# EAGLE board wrist_v2 (EAGLE 9.6.2)
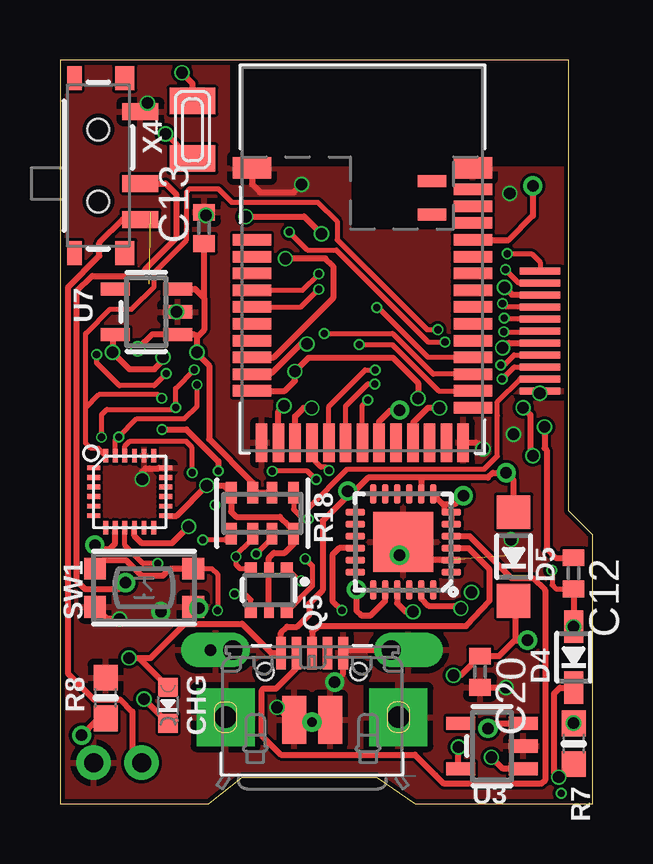
[diagram p0: board, top side]
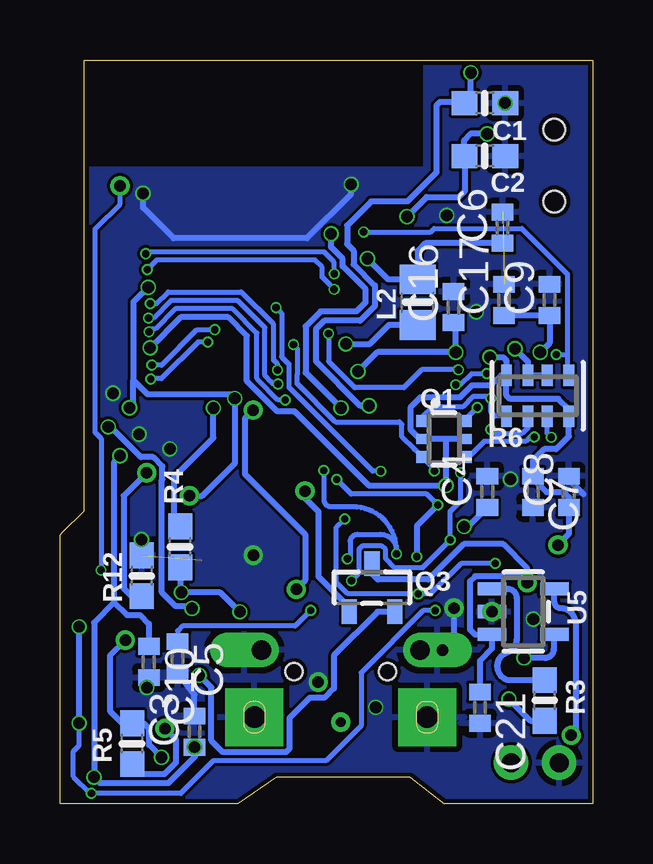
[diagram p1: board, bottom side, seen from below]

Size 22.2 x 31 mm. Coordinates in mm from the lower left corner, seen from the top.
Outline: 0,0 6.2,0 7.6,1.1 13.2,1.1 14.8,0 22.1,0 22.2,0 22.2,11.2 22.1,11.3 21.2,12.2 21.2,31 0,31 0,0
Copper layers (1*16): Top 0.035mm / dielectric 1.6mm / Bottom 0.035mm
Design rules "jlcpcb-2layers *": minimum track width 5mil, minimum drill 0.3mm, track to track 5mil, track to pad 5mil, pad to pad 5mil, via to via 5mil, smd to smd 5mil, copper to edge 0.2mm, drill to drill 6mil, minimum pad ring 10mil, minimum via ring 3mil, stop-mask expansion 4mil, vias tented up to drill 20mil, thermal gap 10mil
Net classes: 0 default: width 0.203 mm; 1 highpower: width 0.254 mm, drill 0.483 mm

## Footprints (pad centres in the part's own frame; a part is rotated, then mirrored left to right if it is on the bottom)
0603-NO = smd 1.075 x 1: 1 -0.85,0; 2 0.85,0
C0402 = smd 0.7 x 0.9: 1 -0.65,0; 2 0.65,0
CHIPLED_0603_NOOUTLINE = smd 0.8 x 0.8: A 0,-0.75; C 0,0.75
SOD-323 = smd 1.35 x 0.8: A 1.27,0; C -1.27,0
SOD-123 = smd 1.4 x 1.4: A 1.85,0; C -1.85,0
ADAFRUIT_SENSOR_QFN24_3MM_NOEP = smd 0.55 x 0.2: 1 -1.5,1; 2 -1.5,0.6; 3 -1.5,0.2; 4 -1.5,-0.2; 5 -1.5,-0.6; 6 -1.5,-1; 13 1.5,-1; 14 1.5,-0.6; 15 1.5,-0.2; 16 1.5,0.2; 17 1.5,0.6; 18 1.5,1 | smd 0.2 x 0.55: 7 -1,-1.5; 8 -0.6,-1.5; 9 -0.2,-1.5; 10 0.2,-1.5; 11 0.6,-1.5; 12 1,-1.5; 19 1,1.5; 20 0.6,1.5; 21 0.2,1.5; 22 -0.2,1.5; 23 -0.6,1.5; 24 -1,1.5
0805-NO = smd 1.24 x 1.5: 1 -0.95,0; 2 0.95,0
SOT363 = smd 0.5 x 0.5: 1 -0.75,-0.9; 3 0.75,-0.9; 4 0.75,0.9; 6 -0.75,0.9 | smd 0.4 x 0.5: 2 0,-0.9; 5 0,0.9
SOT23-R = smd 0.635 x 1.016: 1 -0.95,-1; 2 0.95,-1; 3 0,1
RESPACK_4X0603 = smd 0.45 x 0.9: 1 -1.3,-0.85; 2 -0.4,-0.85; 3 0.4,-0.85; 4 1.3,-0.85; 5 1.3,0.85; 6 0.4,0.85; 7 -0.4,0.85; 8 -1.3,0.85
SWITCH_SPST_SMD_A = smd 0.7 x 1.5: 1 -2.25,-1.75; 2 -0.75,-1.75; 3 2.25,-1.75 | smd 1 x 0.6: GND1 -3.65,1; GND3 3.65,1 | smd 1 x 0.8: GND2 -3.65,-1.1; GND4 3.65,-1.1 | hole 0.9: -1.5,0; 1.5,0
BTN_KMR2_4.6X2.8 = smd 0.9 x 0.9: A 2.05,0.8; A' -2.05,0.8; B 2.05,-0.8; B' -2.05,-0.8
BLE_MODULE_RAYTAC_MDBT42 = smd 1.6 x 0.9: 1 -4.6,3.8; 39 4.6,3.8 | smd 1.6 x 0.48: 2 -4.6,0.8; 3 -4.6,0.1; 4 -4.6,-0.6; 5 -4.6,-1.3; 6 -4.6,-2; 7 -4.6,-2.7; 8 -4.6,-3.4; 9 -4.6,-4.1; 10 -4.6,-4.8; 11 -4.6,-5.5; 25 4.6,-6.2; 26 4.6,-5.5; 27 4.6,-4.8; 28 4.6,-4.1; 29 4.6,-3.4; 30 4.6,-2.7; 31 4.6,-2; 32 4.6,-1.3; 33 4.6,-0.6; 34 4.6,0.1; 35 4.6,0.8; 36 4.6,1.5; 37 4.6,2.2; 38 4.6,2.9 | smd 0.48 x 1.6: 12 -4.2,-7.65; 13 -3.5,-7.65; 14 -2.8,-7.65; 15 -2.1,-7.65; 16 -1.4,-7.65; 17 -0.7,-7.65; 18 0,-7.65; 19 0.7,-7.65; 20 1.4,-7.65; 21 2.1,-7.65; 22 2.8,-7.65; 23 3.5,-7.65; 24 4.2,-7.65 | smd 1.2 x 0.5: 40 2.9,3.25; 41 2.9,1.85
SOT23-5 = smd 0.55 x 1.2: 1 -0.95,-1.3; 2 0,-1.3; 3 0.95,-1.3; 4 0.95,1.3; 5 -0.95,1.3
MICROBUILDER_QFN24_4MM_SMSC = smd 0.8 x 0.28: 1 -2,1.25; 2 -2,0.75; 3 -2,0.25; 4 -2,-0.25; 5 -2,-0.75; 6 -2,-1.25; 13 2,-1.25; 14 2,-0.75; 15 2,-0.25; 16 2,0.25; 17 2,0.75; 18 2,1.25 | smd 0.28 x 0.8: 7 -1.25,-2; 8 -0.75,-2; 9 -0.25,-2; 10 0.25,-2; 11 0.75,-2; 12 1.25,-2; 19 1.25,2; 20 0.75,2; 21 0.25,2; 22 -0.25,2; 23 -0.75,2; 24 -1.25,2 | smd 2.5 x 2.5: THERM 0,0
FPC1105 = smd 0.3 x 1.7: P$1 -2,0; P$2 -1.5,0; P$3 -1,0; P$4 -0.5,0; P$5 0,0; P$6 0.5,0; P$7 1,0; P$8 1.5,0; P$9 2,0; P$10 2.5,0; P$11 3,0
M3-HOLE_M0.9-HOLE = drill 0.8 pad 0.55: P$1 0,0
4UCONN_20329_V2 = smd 1 x 2: BASE@1 -0.75,-2; BASE@2 0.75,-2 | smd 0.4 x 1.35: D+ 0,0.775; D- -0.65,0.775; GND 1.3,0.775; ID 0.65,0.775; VBUS -1.3,0.775 | drill 0.8 pad 1.143 offset: SPRT@1 -3.3,0.9; SPRT@2 3.3,0.9 | drill 0.9 pad 2.413 square: SPRT@3 -3.6,-1.9; SPRT@4 3.6,-1.9 | hole 0.7: -1.95,0; 1.95,0
XTAL3215 = smd 1.1 x 1.9: P$1 1.2,0; P$2 -1.2,0

## Placement (x,y rotation side)
C1  22pF  [0603-NO]  4.5,29.2 0 bottom
C2  22pF  [0603-NO]  4.5,27 0 bottom
C3  10uF  [C0402]  16.6,3 90 bottom
C4  0.1uF  [C0402]  4.4,13 90 bottom
C5  10uF  [C0402]  17.3,6.1 270 bottom
C6  1uF  [C0402]  3.76,24.01 90 bottom
C7  1uF  [C0402]  2.5,13 270 bottom
C8  0.1uF  [C0402]  1,13 90 bottom
C9  0.1uF  [C0402]  1.8,21 90 bottom
C10  0.1uF  [C0402]  18.5,5.9 270 bottom
C12  0.1uF  [C0402]  21.4,9.6 270 top
C13  10uF  [C0402]  6,24 90 top
C16  10uF  [C0402]  5.8,20.7 90 bottom
C17  10uF  [C0402]  3.7,21 90 bottom
C20  10uF  [C0402]  17.5,5.5 270 top
C21  10uF  [C0402]  4.7,4 270 bottom
CHG  RED  [CHIPLED_0603_NOOUTLINE]  4.5,4.1 180 top
D4  1N4148  [SOD-323]  21.4,6.1 90 top
D5  MBR120  [SOD-123]  18.9,10.3 90 top
IC1  ADAFRUIT_SENSOR_MPU-9250_ICM20948  [ADAFRUIT_SENSOR_QFN24_3MM_NOEP]  2.9,13 0 top
L2  10uH  [0805-NO]  7.3,20.9 270 bottom
Q1  BSS138  [SOT363]  6.2,15.2 270 bottom
Q3  DMG3415U-7  [SOT23-R]  9.2,9 0 bottom
Q5  BSS138  [SOT363]  8.7,8.9 180 top
R3  1K  [0603-NO]  2,4.3 90 bottom
R4  1K  [0603-NO]  17.2,10.7 90 bottom
R5  100K  [0603-NO]  19.2,2.5 90 bottom
R6  10K  [RESPACK_4X0603]  2.3,17 180 bottom
R7  10K  [0603-NO]  21.4,2.5 270 top
R8  10K  [0603-NO]  1.9,4.4 90 top
R12  100k  [0603-NO]  18.8,9.5 270 bottom
R18  10K  [RESPACK_4X0603]  8.43,12.1 180 top
S2  [SWITCH_SPST_SMD_A]  1.6,26.6 90 top
SW1  KMR2  [BTN_KMR2_4.6X2.8]  3.5,9 0 top
U1  MDBT42  [BLE_MODULE_RAYTAC_MDBT42]  12.6,22.7 0 top
U3  AP2112(3.3V)  [SOT23-5]  18,2.4 90 top
U5  MCP73831T-2ACI/OT  [SOT23-5]  2.9,8 270 bottom
U7  MIC5225-1.8V  [SOT23-5]  3.6,20.5 90 top
U8  [MICROBUILDER_QFN24_4MM_SMSC]  14.3,10.9 180 top
U$7  FPC1105  [FPC1105]  20,20.2 270 top
U$9  M3-HOLE_M0.9-HOLE0.9MM  [M3-HOLE_M0.9-HOLE]  3.4,1.7 0 bottom
U$13  M3-HOLE_M0.9-HOLE0.9MM  [M3-HOLE_M0.9-HOLE]  1.4,1.7 0 bottom
X3  4u20329  [4UCONN_20329_V2]  10.5,5.5 0 top
X4  32.768  [XTAL3215]  5.52,28.09 90 top

## Library data of the parts
C1 C2 CHG D4 D5 L2 Q1 Q3 Q5 R3-R8 R12 R18 SW1 U1 U3 U5 U7 X3 = microbuilder
C3-C10 C12 C13 C16 C17 C20 C21 = rcl; SPICEPREFIX: C
IC1 = Adafruit ICM20948
S2 = SparkFun-Switches; PROD_ID: SWCH-10651; SF_SKU: COM-10860
U8 = Adafruit nRF52 Bluefruit Feather
U$7 = my_library
U$9 U$13 = 3M_Hole
X4 = adafruit2

## Nets
1.8V [highpower]: C7.1 C8.1 C9.1 C17.1 IC1.8 IC1.13 Q1.2 Q1.5 Q5.2 Q5.5 R6.4 R6.8 R18.4 R18.8 U7.5 U$7.P$7
3.3V [highpower]: C3.1 C10.1 C13.1 C16.1 D4.C R6.2 R6.3 R7.2 R18.2 R18.3 U1.11 U3.5 U7.1 U7.3 U8.5 U8.6 U8.7 U$7.P$3
!CS: IC1.22 Q5.1 R18.5
A0/0.02: Q5.6 R18.7 U1.15
A1/0.03: U1.16 U$7.P$4
A2/0.04: U1.17 U$7.P$5
A3/0.05: U1.18 U$7.P$6
A4/0.28: U1.5 U$7.P$1
A5/0.29: U1.6 U$7.P$2
AD0/SDO: IC1.9 Q5.4 R18.1 U$7.P$10
DTR [highpower]: C12.1 U8.23
EN [highpower]: R5.1 U3.3
GND [highpower]: C1.2 C2.2 C3.2 C4.2 C5.2 C6.2 C7.2 C8.2 C9.2 C10.2 C13.2 C16.2 C17.2 C20.2 C21.2 IC1.18 IC1.20 R8.2 R12.1 S2.3 SW1.B SW1.B' U1.1 U1.12 U1.24 U1.39 U3.2 U5.2 U7.2 U8.2 U8.THERM U$7.P$11 U$13.P$1 X3.BASE@1 X3.BASE@2 X3.GND X3.SPRT@1 X3.SPRT@2 X3.SPRT@3 X3.SPRT@4
MISO: Q5.3 R18.6 U1.28
MOSI: Q1.6 R6.7 U1.27
N$1 [highpower]: C1.1 U1.13 X4.P$1
N$2 [highpower]: C2.1 U1.14 X4.P$2
N$3 [highpower]: L2.2 U1.10
N$4: CHG.C R3.1
N$5: C5.1 U8.16
N$6: C4.1 IC1.10
N$8 [highpower]: C6.1 L2.1 U1.9
N$9 [highpower]: R3.2 U5.1
N$10 [highpower]: R8.1 U5.5
N$12 [highpower]: S2.1 U$9.P$1
N$15 [highpower]: R4.1 U8.21
RESET: C12.2 D4.A R7.1 SW1.A SW1.A' U1.35
RXD [highpower]: R4.2 U1.21
SCK: Q1.3 R6.6 U1.26
SCL/SCLK: IC1.23 Q1.4 R6.1 U$7.P$9
SDA/SDI: IC1.24 Q1.1 R6.5 U$7.P$8
TXD [highpower]: U1.19 U8.20
USBD+ [highpower]: U8.3 X3.D+
USBD- [highpower]: U8.4 X3.D-
VBAT [highpower]: C21.1 Q3.3 S2.2 U5.3
VBUS [highpower]: CHG.A D5.A Q3.1 R12.2 U5.4 U8.8 X3.VBUS
VIN [highpower]: C20.1 D5.C Q3.2 R5.2 U3.1

## Tracks (layer width: path | path; a pad name or v marks a point on that pad's centre or on a via)
1.8V  (via drill 0.48, 0.48 pad 0.8)
  Top 0.254: Q5.5 Q5.2 8.7,10.24 8.91,10.46 9.37,10.46 9.74,10.82 R18.8 9.73,11.57 9.55,11.57 9.16,11.95 7.34,11.95 7.13,12.16 R18.4 6.83,13.26 v6.12,13.26 4.86,12 IC1.13 | v1.45,10.78 1.63,10.6 2.05,10.6 2.3,10.85 IC1.8 | v18.45,19 18.64,19.19 18.69,19.19 18.7,19.2 U$7.P$7 | v4.29,18.61 4.29,18.47 3.93,18.11 2.89,18.11 v2.19,18.81 2.19,19.44 U7.5
  Bottom 0.254: 1,11.24 | 1,11.24 v1.45,10.79 v1.45,10.78 | R6.4 3.82,17.85 4.22,17.45 5.03,17.45 5.54,16.93 7.18,16.93 7.6,16.51 7.6,15.6 7.21,15.2 Q1.2 6.17,15.2 | R6.4 3.6,17.01 3.46,16.87 1.43,16.87 1,16.44 R6.8 1,15.31 1.53,14.78 2.02,14.78 2.5,14.3 C7.1 2.5,13.56 1.92,12.98 1.2,12.98 1,12.78 C8.1 1,11.24 | R6.4 3.6,18.47 3.74,18.61 v4.29,18.61 | v18.45,19 17.17,20.27 15.19,20.27 14.41,19.49 14.41,17.61 13.14,16.35 12.42,16.35 9.34,13.27 v6.13,13.27 v6.12,13.26 6.12,13.66 | v2.19,18.81 1.8,19.2 C9.1 C17.1 | Q1.5 6.17,15.2 | 6.12,13.66 | 6.17,15.2 6.12,15.15 6.12,13.66
3.3V  (via drill 0.48, 0.48 pad 0.8)
  Top 0.254: U8.5 U8.6 16.02,12.15 16.02,12.43 15.95,12.5 | U8.7 15.95,12.5 | 15.95,12.5 16.48,12.5 v16.81,12.83 | R18.2 R18.3 8.03,13.37 6.21,15.19 6.21,18.27 5.71,18.76 v5.71,18.82 5.71,19.45 | v14.92,16.89 14.92,17.54 13.88,18.57 10.35,18.57 v9.79,18.01 9.79,17.62 9.37,17.2 U1.11 | 5.71,19.45 5.61,19.55 U7.1 4.88,19.57 3.85,19.57 v3.24,18.96 | v18.52,21.52 18.84,21.21 U$7.P$3 | 6,21.08 6,19.74 5.71,19.45 | U7.3 5.63,21.45 6,21.08 | 6,21.08 C13.1 | v19.7,14.5 19.6,14.6 19.6,16.2 v19.3,16.5 | R7.2 20.85,1.1 v20.78,1.1 20.59,1.29 20.59,4.59 20.83,4.83 D4.C | U3.5 16.6,1.55 C3.1
  Bottom 0.254: R6.2 R6.3 2.7,18.42 v3.24,18.96 | v16.81,12.83 16.28,12.83 14.91,14.2 14.91,16.89 v14.92,16.89 15.09,17.06 18.55,17.06 19.14,17.65 | v9.79,18.01 8.98,18.82 v5.71,18.82 5.71,19.96 C16.1 | v18.52,21.52 19.14,20.91 19.14,17.65 | C10.1 18.5,7.5 18.86,7.86 19.41,7.86 19.93,8.39 | v19.7,14.5 19.93,14.27 19.93,8.39 | v19.3,16.5 19.14,16.66 19.14,17.65 | 16.6,2.51 C3.1 16.58,2.33 16.58,1.96 17.69,0.85 20.53,0.85 v20.78,1.1 20.78,7.54 19.93,8.39
  other vias: 16.6,2.35
!CS  (via drill 0.3)
  Top 0.203: R18.5 6.87,10.99 v5.94,10.99 | IC1.22 2.7,14.9 2.91,15.11 5.24,15.11 5.51,14.84 v5.51,13.79 | v10.06,9.29 9.96,9.29 Q5.1
  Bottom 0.203: v10.06,9.29 9.75,9.6 9.75,10.6 9.61,10.74 8.79,10.74 8.64,10.59 8.64,10.22 8.24,9.83 7.1,9.83 v5.94,10.99 5.94,12.18 5.51,12.61 v5.51,13.79
A0/0.02  (via drill 0.3)
  Top 0.203: Q5.6 10.52,9.07 10.52,9.91 v10.22,10.21 | v8.18,10.41 8.34,10.57 8.35,10.57 8.83,11.05 R18.7 | U1.15 10.55,15 10.55,14.34 10.87,14.02 11.08,14.02 v11.21,13.89
  Bottom 0.203: v11.21,13.89 11.2,13.88 11.2,12.67 arc-90 10.9,12.37 9.99,12.37 arc90 8.18,10.56 | v10.22,10.21 arc-90 10.11,10.32 10.11,10.91 arc90 9.8,11.22 8.84,11.22 arc90 8.18,10.56 | v8.18,10.41 8.18,10.56
A1/0.03  (via drill 0.3)
  Top 0.203: U1.16 11.2,16.56 12.71,18.07 v13.14,18.07 | U$7.P$4 18.58,20.7 v18.44,20.84
  Bottom 0.203: v13.14,18.07 13.14,18.32 13.3,18.48 13.3,19.98 14.65,21.33 17.7,21.33 18.19,20.84 v18.44,20.84
A2/0.04  (via drill 0.3)
  Top 0.203: U1.17 11.9,16.57 12.82,17.5 v13.12,17.5 | U$7.P$5 18.55,20.2 v18.51,20.25
  Bottom 0.203: v18.51,20.25 18.3,20.25 17.58,20.97 14.8,20.97 13.66,19.84 13.66,17.86 13.39,17.58 13.3,17.5 v13.12,17.5
A3/0.05  (via drill 0.3)
  Top 0.203: U1.18 12.6,16.61 v12.82,16.83 | v18.49,19.67 19.97,19.67 U$7.P$6
  Bottom 0.203: v12.82,16.83 13.12,16.83 13.95,17.65 13.95,17.67 13.99,17.72 13.99,19.62 15.01,20.63 17.39,20.63 18.23,19.79 18.36,19.79 v18.49,19.67
A4/0.28  (via drill 0.3)
  Top 0.203: U1.5 10.1,21.4 v10.78,22.08 | v18.63,22.92 19.65,22.92 20,22.57 U$7.P$1
  Bottom 0.203: v10.78,22.08 10.78,22.57 11.2,22.99 18.56,22.99 v18.63,22.92
A5/0.29  (via drill 0.3)
  Top 0.203: U1.6 10.04,20.7 v10.78,21.44 | v18.56,22.26 19.12,21.7 U$7.P$2
  Bottom 0.203: v10.78,21.44 11.28,21.94 11.28,22.36 11.58,22.66 18.16,22.66 v18.56,22.26
AD0/SDO  (via drill 0.3)
  Top 0.203: v4.07,10.01 3.46,10.01 2.7,10.76 IC1.9 | U$7.P$10 19.18,17.7 18.23,16.75 18.23,16.16 18.22,16.16 18.22,14.48 17.69,13.95 11.98,13.95 10.34,12.31 v10.34,11.87 10.13,11.87 9.73,12.27 R18.1 | Q5.4 7.95,8.49 7.71,8.73 v7.27,8.73
  Bottom 0.203: v4.07,10.01 5.49,10.01 6.76,8.73 v7.27,8.73 7.28,8.74 10.21,8.74 10.68,9.21 10.68,11.53 v10.34,11.87
DTR  (via drill 0.48)
  Top 0.254: v16.7,8.14 16.59,8.25 15.35,8.25 15.05,8.54 U8.23 | v20.19,15.7 20.19,14.82 20.27,14.74 20.27,10.63 20.65,10.25 C12.1
  Bottom 0.254: v16.7,8.14 16.79,8.23 17.38,8.23 17.95,8.8 17.95,13.5 17.94,13.52 17.94,14.06 18.32,14.44 18.83,14.44 20.09,15.7 v20.19,15.7
EN  (via drill 0.48 pad 0.8)
  Top 0.254: v17.83,3.13 18.05,3.35 U3.3
  Bottom 0.254: R5.1 18.78,1.23 17.85,1.23 17.36,1.72 17.36,2.66 v17.83,3.13
GND  (via drill 0.48, 0.48 pad 0.8)  (2 unrouted)
  Top 0.254: X3.SPRT@2 11.93,6.4 X3.GND 11.8,5.81 11.77,5.78 11.77,5.39 v11.44,5.06 | U8.2 14.35,10.15 v14.14,10.36 14.14,10.74 U8.THERM | X3.SPRT@1 v6.28,6.4 v6.27,6.39 | SW1.B' 1.96,7.69 v2.48,7.69 | U1.24 17.36,15.05 v17.62,14.79 | U1.1 8,25.82 8.34,25.48 9.74,25.48 v10.07,25.81 | X3.BASE@1 9.55,3.5 v9.04,4.01 | S2.3 3.35,28.9 C1.2 | U7.2 v4.86,20.5 | C13.2 6.08,24.57 v6.08,24.52 | v3.42,13.53 3.42,13.82 3.57,13.97 4.11,13.97 4.13,14 IC1.18 | C20.2 18.56,4.85 v18.58,4.83 | U$7.P$11 v20,17.12 v19.99,17.11
  Bottom 0.254: v6.27,6.39 5.78,6.88 v5.78,8.15 | v18.74,25.44 18.74,24.84 17.47,23.57 11.91,23.57 10.07,25.41 v10.07,25.81 | v18.58,4.83 18.4,5.01 C10.2 | C3.2 16.6,4.55 C5.2 | R12.1 v18.8,11.01 | C8.2 1,13.51 0.4,12.9
  other vias: 4.2,8 3.65,29.2 18.9,15.4
  pour Top: 0,31 7,31 7,26.5 22.9,26.5 22.9,-0.08 0,-0.08
  pour Bottom: 0,31 7,31 7,26.5 22.92,26.5 22.92,-0.09 0,-0.09
MISO  (via drill 0.3)
  Top 0.203: v13.2,20.67 13.26,20.67 15.33,18.6 U1.28 | 7.94,11.15 7.94,10.95 7.33,10.34 v7.33,10.29 7.33,9.96 7.49,9.8 Q5.3 | v10.67,13.51 v10.66,13.51 10.31,13.86 v8.84,13.86
  Top 0.254: 7.94,11.15 R18.6
  Bottom 0.203: v13.2,20.67 12.97,20.44 12.97,18.62 12.65,18.3 12.65,17.34 9.17,13.86 v8.84,13.86 | v6.46,12.45 6.92,12.9 10.07,12.9 v10.67,13.51
  Bottom 0.254: v6.46,12.45 7.33,11.58 v7.33,10.29
MOSI  (via drill 0.3)
  Top 0.203: v5.6,18.09 4.82,17.3 v4.82,16.5 4.82,16.43 1.95,16.43 1.73,16.21 v1.73,15.27 | v11.01,19.6 13.86,19.6 15.55,17.91 U1.27
  Bottom 0.203: Q1.6 5.3,16.02 v4.82,16.5 | v1.73,15.27 1.9,15.44 R6.7 | v5.6,18.09 7.12,18.09 7.87,17.34 9.91,17.34 11.01,18.44 v11.01,19.6
N$1  (via drill 0.48)
  Top 0.254: U1.13 9.1,16.35 v9.33,16.58 | v5.08,30.47 5.52,30.03 X4.P$1
  Bottom 0.254: v9.33,16.58 9.68,16.58 11.54,18.44 11.54,19.77 11.18,20.13 9.69,20.13 9.08,20.74 9.08,21.6 9.96,22.48 9.96,23.05 10.23,23.32 10.23,24.1 9.23,25.1 7.73,25.1 6.51,26.32 6.51,29.11 6.36,29.26 5.41,29.26 C1.1 5.08,29.51 v5.08,30.47
N$2  (via drill 0.48)
  Top 0.254: U1.14 9.8,16.14 10.15,16.49 v10.49,16.49 | v7.74,24.47 10.18,24.47 v10.9,23.75 | X4.P$2 5.42,26.89 v4.4,27.92
  Bottom 0.254: v10.49,16.49 11.96,17.96 11.96,19.89 11.34,20.51 9.85,20.51 9.46,20.9 9.46,21.44 10.42,22.41 10.42,22.72 10.9,23.19 v10.9,23.75 | v7.74,24.47 6.92,25.29 5.58,25.29 5.33,25.54 5.33,26.98 C2.1 5.35,27.67 5.1,27.92 v4.4,27.92
N$3  (via drill 0.48)
  Top 0.254: U1.10 8.05,17.95 8.83,17.95 10.04,19.16 v10.29,19.16
  Bottom 0.254: v10.29,19.16 9.29,19.16 8.85,19.6 8.5,19.95 L2.2
N$4  (via drill 0.48)
  Top 0.254: CHG.C v3.5,4.35
  Bottom 0.254: v3.5,4.35 2.6,3.45 R3.1
N$5  (via drill 0.3)
  Top 0.254: U8.16 11.64,10.65 11.35,10.35 11.35,8.45 v11.75,8.05
  Bottom 0.203: C5.1 17.3,7.2 17.1,7.4 12.4,7.4 v11.75,8.05
N$6  (via drill 0.48)
  Top 0.254: v5.36,11.55 4.66,10.85 3.41,10.85 3.1,11.17 IC1.10
  Bottom 0.254: C4.1 5.2,11.55 v5.36,11.55
N$7  (via drill 0.4 pad 0.8)
  other vias: 10.5,3.4
N$8  (via drill 0.48)
  Top 0.254: U1.9 8.91,18.6 11.38,21.07 11.38,22.4 11.06,22.72 v9.39,22.72
  Bottom 0.254: v9.39,22.72 8.52,21.85 L2.1 7.3,23.04 6.98,23.36 C6.1
N$9
  Bottom 0.254: U5.1 3.55,8.95 arc90 3.17,8.57 3.17,6.84 arc72 3.57,6.29 arc-148 3.54,5.15 R3.2
N$10  (via drill 0.48 pad 0.8)
  Top 0.254: v0.9,2.85 1.49,3.44 1.59,3.44 R8.1
  Bottom 0.254: v0.9,2.85 0.71,3.04 0.71,7.51 arc-90 1.34,8.14 arc90 1.6,8.4 U5.5
N$12
  Top 0.254: U$9.P$1 3.02,1.89 3.02,3.83 2.5,4.34 1.41,4.34 0.33,5.43 0.33,21.52 1.64,22.84 1.64,23.2 | 1.64,23.2 1.64,23.38 2.61,24.35 S2.1 | 1.64,23.2
N$15  (via drill 0.48)
  Top 0.254: U8.21 14.05,8.35 14.41,7.99 v14.71,7.99
  Bottom 0.254: R4.1 17.2,8.86 v17.15,8.8 v17.14,8.8 15.52,8.8 v14.71,7.99
RESET  (via drill 0.3, 0.48, 0.48 pad 0.8)
  Top 0.203: SW1.A 6.33,9.8 6.56,9.57 v6.56,8.04 | v20.49,9.73 20.5,9.72 20.5,9.11 20.66,8.95 21.27,8.95
  Top 0.254: v19.7,25.75 19.7,24.51 18.69,23.5 U1.35 | SW1.A' 1.79,10.14 2.75,10.14 3.39,9.51 4.3,9.51 4.59,9.8 SW1.A | D4.A C12.2 21.27,8.95
  Bottom 0.203: v6.56,8.04 7.06,8.04 9.65,5.45 9.65,3.25 11.12,1.78 15.81,1.78 17.17,0.43 v20.89,0.43 20.95,0.43 21.65,1.12 21.65,2.18 21.4,2.42 R7.1 | v20.49,9.73 20.49,15.23 20.73,15.47 20.73,23.96 19.7,25 v19.7,25.75
  Bottom 0.254: R7.1 D4.A
  other vias: 21.4,3.35 21.4,7.37
RXD  (via drill 0.48)
  Top 0.254: v15.81,16.49 15.33,16.49 14.7,15.86 U1.21
  Bottom 0.254: R4.2 17.47,11.82 17.47,13.59 15.81,15.25 v15.81,16.49
SCK  (via drill 0.3)
  Top 0.203: U1.26 15.77,17.2 13.84,19.13 v12.47,19.13
  Top 0.254: v4.25,15.59 v4.26,15.6 5.26,15.6 6.6,14.26 v6.6,13.86
  Bottom 0.203: v12.47,19.13 12.32,18.98 12.32,17.87 12.32,17.5 10.73,15.91 8.06,15.91 7.96,15.81 7.96,15.29 7.45,14.77 7.42,14.77 Q1.3 6.6,13.95 v6.6,13.86 | R6.6 2.7,15.67 2.94,15.43 4.09,15.43 v4.25,15.59
SCL/SCLK  (via drill 0.3)
  Top 0.203: v5.71,17.46 5.71,16.57 5.18,16.05 3.2,16.05 v2.44,15.29 2.3,15.14 IC1.23 | v4.42,17.93 3.92,17.42 2.48,17.42 1.52,18.37 v1.52,18.72 | v9.55,23.83 10.3,23.08 11.51,23.08 15.34,19.24 v16.04,19.24 | v18.42,17.7 18.55,17.82 18.56,17.82 18.93,18.2 U$7.P$9
  Bottom 0.203: Q1.4 5.17,14.45 4.52,15.1 2.8,15.1 2.62,15.29 v2.44,15.29 | v4.42,17.93 5.05,17.93 5.51,17.46 v5.71,17.46 | R6.1 1,18.05 1.06,18.11 1.06,18.73 | v9.55,23.83 6.75,23.83 6.61,23.97 2.95,23.97 1.06,22.08 1.06,18.73 | v16.04,19.24 16.44,19.24 17.97,17.71 18.41,17.71 v18.42,17.7 | v1.52,18.72 1.07,18.72 1.06,18.73
SDA/SDI  (via drill 0.3)
  Top 0.203: IC1.24 1.59,14.8 1.29,14.8 1.07,15.03 1.07,16.5 | 1.07,16.5 1.62,17.05 4.09,17.05 v4.25,16.89 | 1.07,16.5 1.07,19.6 2.08,20.61 2.98,20.61 3.92,21.55 3.92,22.14 5.27,23.5 5.27,23.9 5.27,25.5 5.41,25.63 6.59,25.63 7.15,25.07 10.75,25.07 11.55,24.27 11.55,23.51 15.3,19.75 v15.75,19.75 | v18.37,18.28 18.5,18.28 18.92,18.7 U$7.P$8
  Bottom 0.203: R6.5 4.08,16.15 4.25,16.31 v4.25,16.89 4.31,16.96 5.01,16.96 5.43,16.54 6.67,16.54 7.1,16.11 Q1.1 | v15.75,19.75 16.5,19.75 17.97,18.28 v18.37,18.28
TXD  (via drill 0.48 pad 0.8)
  Top 0.254: v12.35,8.93 12.35,8.04 12.55,7.85 12.95,7.85 13.55,8.44 U8.20 | U1.19 13.3,15.92 13.78,16.4 v14.15,16.4
  Bottom 0.254: v14.15,16.4 14.49,16.06 14.49,13.73 11.99,11.23 11.99,9.29 v12.35,8.93
USBD+
  Top 0.254: X3.D+ 10.5,7.17 10.79,7.4 16.92,7.4 17.89,8.43 17.89,9.79 17.02,10.65 U8.3
USBD-
  Top 0.254: U8.4 17.06,11.15 18.8,9.4 19.7,9.4 20.21,8.9 20.21,0.98 20.06,0.83 16,0.83 15.65,1.18 | 15.65,1.18 | X3.D- 9.81,6.24 9.81,5.6 9,4.79 8.48,4.79 8.42,4.73 8.42,2.83 9.21,2.04 14.79,2.04 15.65,1.18
VBAT  (via drill 0.48 pad 0.8)
  Top 0.254: v2.73,9.21 2.45,8.93 1.05,8.93 0.71,9.27 0.71,21.36 1.35,22 3.3,22 3.56,22.26 3.56,22.29 4.83,23.57 4.83,25.41 4.4,25.85 S2.2
  Bottom 0.254: Q3.3 9.2,9.58 8.96,9.34 6.85,9.34 5.37,10.81 3.74,10.81 2.73,9.81 v2.73,9.21 3,9.48 4.91,9.48 5.12,9.26 5.12,7.26 4.91,7.05 U5.3 4.2,6.46 4.7,5.96 C21.1
VBUS  (via drill 0.48, 0.48 pad 0.8)
  Top 0.254: 15.05,13.59 U8.8 | 15.05,13.59 17.83,13.59 18.03,13.79 v18.59,13.79 18.9,13.48 D5.A | 15.05,13.59 12.84,13.59 12.28,13.03 v11.99,13.03 11.99,12.83 10.95,11.78 10.95,8.89 10.38,8.32 10.38,7.86 9.88,7.37 9.46,7.37 9.2,7.11 X3.VBUS 8.81,6.28 7.59,7.5 5.2,7.5 3.77,6.07 v2.87,6.07 3.28,6.07 CHG.A
  Bottom 0.254: R12.2 18.82,8.63 19.21,8.63 19.55,8.98 19.55,12.83 v18.59,13.79 | v11.99,13.03 11.99,12.73 11.43,12.17 11.43,9.46 10.15,8.18 Q3.1 | U5.4 arc-90 1.63,7.02 1.63,6.43 arc90 1.99,6.07 v2.87,6.07
VIN  (via drill 0.48, 0.48 pad 0.8)
  Top 0.254: D5.C 18.96,8.39 18.96,6.83 18.98,6.81 v19.48,6.81 18.96,6.81 18.3,6.15 C20.1 16.7,5.34 v16.4,5.34 | U3.1 18.45,1.45 v17.97,1.93
  Bottom 0.254: v19.48,6.81 20.12,6.17 20.12,3.87 19.6,3.35 R5.2 18.72,3.35 18.49,3.12 18.49,2.44 v17.97,1.93 | Q3.2 8.96,8 10.79,6.18 10.79,4.79 11.17,4.41 11.79,4.41 12.64,3.56 12.64,2.29 12.79,2.14 15.41,2.14 15.9,2.62 15.9,4.84 v16.4,5.34